# EAGLE board USBIRtoy-v3-3.3volt (EAGLE 5.10)
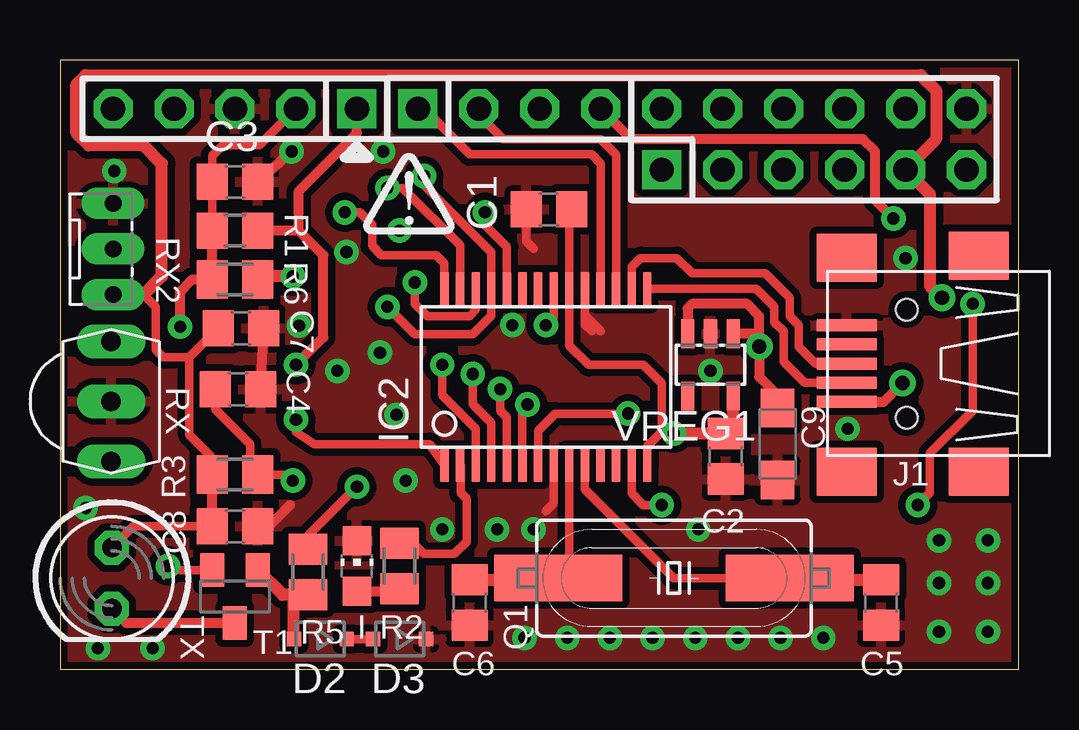
[diagram p0: board, top side]
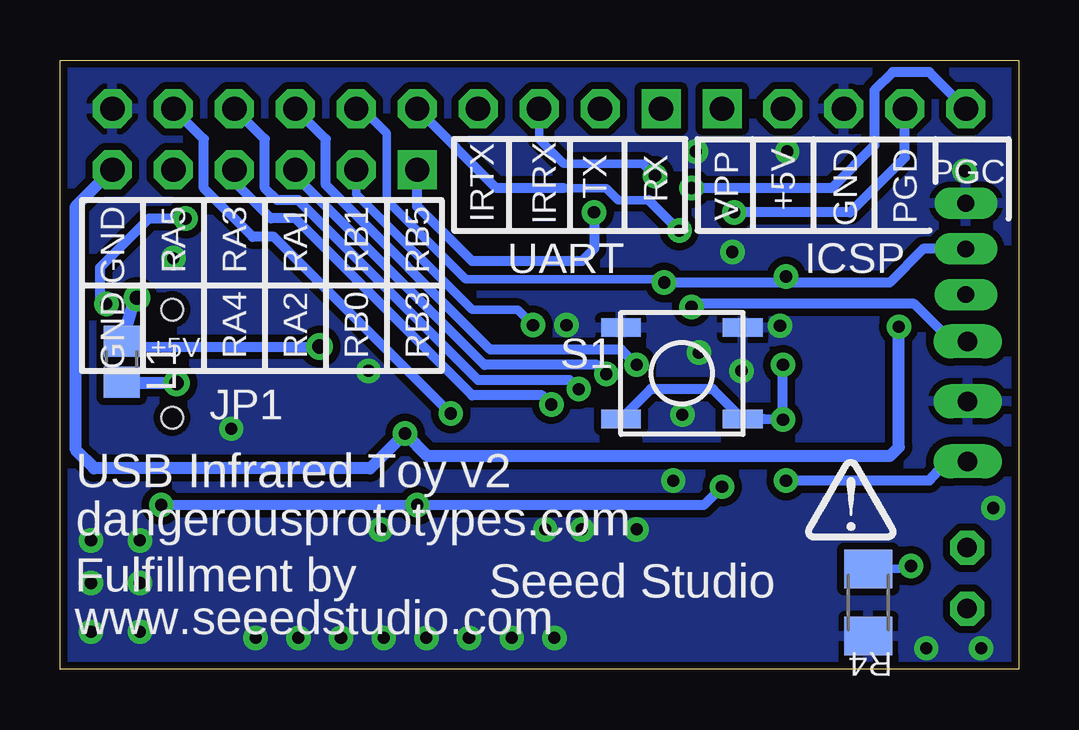
[diagram p1: board, bottom side, seen from below]

Size 39.94 x 25.4 mm. Coordinates in mm from the lower left corner, seen from the top.
Outline: 39.94,0.01 0,0.01 0,25.39 39.94,25.39
Outline: 39.94,0 39.94,0.01
Outline: 39.94,0.01 39.94,25.39
Outline: 39.94,25.39 39.94,25.4
Copper layers (1*16): Top 0.035mm / dielectric 1.5mm / Bottom 0.035mm
Design rules "SparkFun": minimum track width 8mil, minimum drill 20mil, track to track 8mil, track to pad 8mil, pad to pad 8mil, via to via 8mil, smd to smd 8mil, copper to edge 10mil, drill to drill 8mil, minimum pad ring 12mil, minimum via ring 10mil, stop-mask expansion 4mil, vias tented up to drill 25mil, thermal gap 10mil

## Footprints (pad centres in the part's own frame; a part is rotated, then mirrored left to right if it is on the bottom)
C0805 = smd 1.3 x 1.5: 1 -0.95,0; 2 0.95,0
SMC_A = smd 1.6 x 1.4: + -1.5,0; - 1.5,0
DO323 = smd 0.6 x 0.6: A 1.1,0; C -1.1,0
CHIP-LED0805 = smd 1.2 x 1.2: A 0,-1.05; C 0,1.05
SSOP28 = smd 0.348 x 1.397: 1 -4.225,-3.656; 2 -3.575,-3.656; 3 -2.925,-3.656; 4 -2.275,-3.656; 5 -1.625,-3.656; 6 -0.975,-3.656; 7 -0.325,-3.656; 8 0.325,-3.656; 9 0.975,-3.656; 10 1.625,-3.656; 11 2.275,-3.656; 12 2.925,-3.656; 13 3.575,-3.656; 14 4.225,-3.656; 15 4.225,3.656; 16 3.575,3.656; 17 2.925,3.656; 18 2.275,3.656; 19 1.625,3.656; 20 0.975,3.656; 21 0.325,3.656; 22 -0.325,3.656; 23 -0.975,3.656; 24 -1.625,3.656; 25 -2.275,3.656; 26 -2.925,3.656; 27 -3.575,3.656; 28 -4.225,3.656
1X05 = drill 1.016 square: 1 -5.08,0 | drill 1.016 octagon: 2 -2.54,0; 3 0,0; 4 2.54,0; 5 5.08,0
USB-M-S1 = smd 2.5 x 0.5: D+ 2.75,0; D- 2.75,0.8; GND 2.75,-1.6; ID 2.75,-0.8; VBUS 2.75,1.6 | smd 2.5 x 2: GND@1 -2.75,-4.5; GND@2 -2.75,4.5; GND@3 2.75,-4.4; GND@4 2.75,4.5 | hole 0.9: 0.25,2.25; 0.25,-2.25
2X06 = drill 1.016 square: 1 -6.35,-1.27 | drill 1.016 octagon: 2 -6.35,1.27; 3 -3.81,-1.27; 4 -3.81,1.27; 5 -1.27,-1.27; 6 -1.27,1.27; 7 1.27,-1.27; 8 1.27,1.27; 9 3.81,-1.27; 10 3.81,1.27; 11 6.35,-1.27; 12 6.35,1.27
FB805 = smd 1.3 x 1.5: 1 -0.85,0; 2 0.85,0
HC49UP = smd 5.334 x 1.93: 1 -4.826,0; 2 4.826,0
R0805 = smd 1.3 x 1.5: 1 -0.95,0; 2 0.95,0
M0805 = smd 1.3 x 1.6: 1 -0.95,0; 2 0.95,0
M1206 = smd 1.6 x 2: 1 -1.4,0; 2 1.4,0
TSOP18XX = drill 0.813 long: GND -0.001,-0.027; OUT -2.501,-0.027; VCC 2.499,-0.027
QSE15X = drill 0.7 long: 1 -1.9,-0.51; 2 0,-0.51; 3 1.91,-0.51
TACT_SWITCH_SMALL = smd 1.651 x 0.762: 1 -2.54,1.905; 2 2.54,1.905; 3 -2.54,-1.905; 4 2.54,-1.905
SOT23-BEC = smd 1 x 1.4: B -0.95,-1.1; C 0,1.1; E 0.95,-1.1
LED5MM = drill 0.813 octagon: A -1.27,0; K 1.27,0
1X04 = drill 1.016 square: 1 -3.81,0 | drill 1.016 octagon: 2 -1.27,0; 3 1.27,0; 4 3.81,0
SOT23-5 = smd 0.55 x 1.2: BYP 0.95,1.3; EN 0.95,-1.3; GND 0,-1.3; IN -0.95,-1.3; OUT -0.95,1.3

## Placement (x,y rotation side)
C1  0.1uf  [C0805]  20.36,19.18 180 top
C2  0.1uf  [C0805]  27.72,8.89 270 top
C3  1uF  [C0805]  7.28,20.32 0 top
C4  0.2uF  [C0805]  7.4,11.68 0 top
C5  27pf  [C0805]  34.2,2.79 270 top
C6  27pf  [C0805]  17.06,2.79 270 top
C7  0.22uF  [C0805]  7.53,14.22 0 top
C8  1.0uF  [C0805]  7.28,5.97 0 top
C9  [SMC_A]  29.88,9.4 270 top
D2  [DO323]  10.83,1.27 180 top
D3  [DO323]  14.14,1.27 180 top
I  LED  [CHIP-LED0805]  12.36,4.32 0 top
IC2  PIC18FJ2X50SSOP  [SSOP28]  20.23,12.19 0 top
ICSP  [1X05]  7.28,23.37 180 top
J1  USB-SHIELD  [USB-M-S1]  35.52,12.75 180 top
JP1  [2X06]  31.41,22.1 0 top
L1  [FB805]  37.38,12.83 270 bottom
Q1  16MHz  [HC49UP]  25.57,3.81 180 top
R1  10k  [R0805]  7.28,18.29 180 top
R2  2K7  [M0805]  14.14,4.32 90 top
R3  390R  [M0805]  7.28,8.13 180 top
R4  180R  [M1206]  6.26,2.79 90 bottom
R5  1K  [M0805]  10.33,4.06 90 top
R6  390R  [M0805]  7.28,16.26 180 top
RX  TSOP34838  [TSOP18XX]  2.15,11.18 270 top
RX2  QSE159  [QSE15X]  1.69,17.53 90 top
S1  SMD_TACT_SMALL  [TACT_SWITCH_SMALL]  14.03,12.34 180 bottom
T1  1A+, 40hfe+  [SOT23-BEC]  7.28,3.05 180 top
TX  940nm IR LED  [LED5MM]  2.15,3.81 270 top
U$1  [DP-LOGO]  12.61,18.14 0 top
U$2  [DP-LOGO]  8.9,5.38 0 bottom
UART  [1X04]  18.71,23.37 0 top
VREG1  [SOT23-5]  27.09,12.7 180 top

## Library data of the parts
C1-C8 R1-R6 = rcl
C9 D2 D3 L1 RX2 T1 VREG1 = dp_devices
I TX = led
IC2 = dp_devices; PIC18FJ2X50: PIC18FJ2X50
ICSP = pinhead-2
J1 = con-usb-2
JP1 UART = pinhean-jer
Q1 = crystal
RX = tsop
S1 U$1 U$2 = DP-logo

## Nets
3V3: C1.1 C2.1 C3.1 IC2.14 IC2.20 ICSP.2 JP1.11 R1.2 R6.2 VREG1.OUT
$N1112: J1.VBUS L1.2
C0: IC2.11
C1: IC2.12
GND: C1.2 C2.2 C3.2 C4.2 C5.2 C6.2 C7.2 C8.2 C9.- D3.C I.C IC2.8 IC2.19 ICSP.3 J1.GND JP1.12 R4.1 RX2.3 RX.GND S1.3 S1.4 VREG1.GND
IRDETECT: IC2.26 JP1.4 R6.1 RX2.2
IRRX: IC2.25 RX.OUT UART.3
IRTX: IC2.13 R5.2 UART.4
MCLR: IC2.1 ICSP.1 R1.1 S1.1 S1.2
N$1: C6.1 IC2.9 Q1.2
N$2: C5.1 IC2.10 Q1.1
N$4: D2.C D3.A
N$5: R4.2 T1.E
N$7: I.A R2.1
N$8: C4.1 R3.1 RX.VCC
N$9: IC2.2 R2.2
N$12: D2.A R5.1 T1.B
N$13: T1.C TX.K
PGC: IC2.27 ICSP.5
PGD: IC2.28 ICSP.4
RA1: IC2.3 JP1.6
RA2: IC2.4 JP1.5
RA3: IC2.5 JP1.8
RA4: IC2.6 JP1.7
RA5: IC2.7 JP1.10
RB0: IC2.21 JP1.3
RB1: IC2.22
RB2: IC2.23
RB3: IC2.24 JP1.1
RB5: JP1.2
RC4: IC2.15 J1.D-
RC5: IC2.16 J1.D+
RX: IC2.18 UART.1
TX: IC2.17 UART.2
VUSB: C7.1 C8.1 C9.+ JP1.9 L1.1 R3.2 RX2.1 TX.A VREG1.EN VREG1.IN

## Tracks (layer width: path | path; a pad name or v marks a point on that pad's centre or on a via)
3V3  (via drill 0.51)
  Top 0.356: C1.1 21.21,19.07 IC2.20 21.21,13.5 22.01,12.7 24.3,12.7 25.06,11.94 25.06,9.91 | IC2.14 24.46,9.3 25.06,9.91 | v25.57,9.84 25.12,9.84 25.06,9.91 | R1.2 C3.1 6.33,21.4 6.77,21.84 8.29,21.84 ICSP.2
  Top 0.406: R6.2 R1.2 | R6.2 6.07,16.51 | R6.2 5.5,16.26 4.99,15.75 v4.99,14.29
  Top 0.508: C1.1 21.63,19.49 | v25.57,9.84 C2.1 28.04,10.16 VREG1.OUT
  Bottom 0.508: v4.99,14.29 4.99,9.27 5.37,8.89 24.62,8.89 v25.57,9.84 27.02,8.38 38.52,8.38 39.28,9.14 39.28,19.3 JP1.11
$N1112  (via drill 0.6)
  Top 0.406: J1.VBUS 34.3,11.15 v35.09,11.94
  Bottom 0.508: v35.09,11.94 36.83,11.94 L1.2
GND  (via drill 0.51)
  Top 0.356: 22.52,14.1 21.86,14.76 IC2.19 21.86,14.38 22.14,14.1 | IC2.8 20.56,6.93 20.23,6.6 | C1.2 19.41,17.84 19.72,17.53
  Top 0.406: C4.2 C7.2 | C8.2 8.67,5.97 9.56,6.86 | C3.2 v9.64,21.59
  other vias: 9.94,14.33 2.25,20.78 13.32,13.21 14.01,10.62 26.58,5.84 14.39,7.87 1.56,0.89 27.09,12.45 13.45,21.59 35.22,17.14 32.8,10.03 11.93,17.4 15.91,5.84 18.2,5.84 18.83,14.35 24.68,1.32 11.54,12.45 36.61,1.57 38.65,1.57 38.65,3.61 36.61,3.61 36.61,5.38 38.65,5.38 26.45,1.32 22.9,1.32 21.12,1.32 19.34,1.32 28.23,1.32 30.01,1.32 31.79,1.32 1.05,6.73 3.85,0.89 19.72,5.84
  pour Top (isolate 0.305): -1.1,0 -1.1,25.4 40.81,25.4 40.81,0
  pour Bottom (isolate 0.305): -1.1,0 40.81,0 40.81,25.4 -1.1,25.4
IRDETECT  (via drill 0.51)
  Top 0.356: IC2.26 17.31,14.99 17.06,14.73 15.28,14.73 14.77,15.24 v14.77,16.13
  Top 0.508: v9.69,16.38 8.35,16.38 R6.1
  Bottom 0.356: JP1.4 27.34,23.37 26.33,22.35 26.33,19.56 23.03,16.26 14.9,16.26 v14.77,16.13
  Bottom 0.406: 9.82,16.13 5.37,16.13 3.98,17.53 RX2.2 | 9.82,16.13 v14.77,16.13 | v9.69,16.38 9.69,16.26 9.82,16.13
IRRX  (via drill 0.51)
  Top 0.356: v13.63,15.11 14.77,13.97 17.18,13.97 17.96,14.74 IC2.25 17.96,17.39 15.15,20.19 v15.15,20.57
  Bottom 0.356: 19.98,22.86 19.98,22.1 18.96,21.08 15.66,21.08 v15.15,20.57
  Bottom 0.406: 19.98,22.86 UART.3 | v13.63,15.11 13.5,15.24 4.36,15.24 2.83,13.72 2.16,13.72 RX.OUT
IRTX  (via drill 0.51)
  Top 0.356: IC2.13 23.81,7.35 24.3,6.86 v25.06,6.86 | v38.01,15.24 38.01,10.79 36.23,9.02 36.23,7.37 v35.73,6.86 | R5.2 10.33,5.59 v12.36,7.62
  Top 0.406: R5.2 10.07,5.01 | UART.4 23.79,22.1 33.44,22.1 33.95,21.59 33.95,19.56 v34.71,18.8
  Bottom 0.356: v12.36,7.62 12.36,7.37
  Bottom 0.406: v34.71,18.8 36.23,18.8 38.27,16.76 38.27,15.49 v38.01,15.24 | v12.36,7.62 13.12,6.86 v25.06,6.86 v35.73,6.86
MCLR  (via drill 0.51)
  Top 0.356: v9.82,10.41 9.82,9.91 10.58,9.4 15.4,9.4 IC2.1
  Top 0.406: ICSP.1 12.36,22.35 9.94,19.94 9.94,18.29 | v9.82,12.7 10.96,13.84 10.96,17.27 9.94,18.29 | 9.94,18.29 R1.1
  Bottom 0.406: S1.2 15.33,11.68 12.74,11.68 S1.1 10.6,10.44 v9.82,10.41 v9.82,12.7
N$1
  Top 0.356: IC2.9 21.21,4.11 21.25,4.06 20.99,4.06 Q1.2
  Top 0.508: C6.1 19.91,3.74 19.98,3.81 Q1.2
N$2
  Top 0.356: IC2.10 21.86,7.52 25.57,3.81 Q1.1
  Top 0.508: C5.1 30.97,3.74 30.9,3.81 Q1.1
N$4
  Top 0.356: D2.C D3.A
N$5  (via drill 0.51)
  Top 0.356: T1.E 4.65,4.15 v4.48,4.32
  Bottom 0.356: R4.2 4.61,4.19 v4.48,4.32
N$7
  Top 0.406: I.A 14.04,3.27 R2.1
N$8  (via drill 0.51)
  Top 0.356: v9.69,7.87 9.56,8.13 R3.1 7.91,8.44 7.91,9.4 6.45,10.86 C4.1
  Bottom 0.406: RX.VCC 3,8.68 3.72,7.87 v9.69,7.87
N$9
  Top 0.356: R2.2 14.71,5.27 15.15,4.83 16.42,4.83 16.93,5.33 16.93,7.11 16.68,7.37 16.68,8.52 IC2.2
N$12
  Top 0.508: 9.82,3.11 9.26,3.11 T1.B | 9.82,3.11 R5.1 | D2.A 9.73,3.03 9.82,3.11
N$13
  Top 0.406: T1.C 2.74,1.95 TX.K
PGC  (via drill 0.51)
  Top 0.356: 13.88,20.07 v13.63,20.07 14.26,20.07 16.66,17.67 IC2.27
  Bottom 0.406: v13.63,20.07 7.79,20.07 6.01,21.84 6.01,24.13 5.25,24.89 3.72,24.89 ICSP.5
PGD  (via drill 0.51)
  Top 0.356: IC2.28 16.01,16.92 15.66,17.27 13.37,17.27 12.99,17.65 12.99,18.54 12.48,19.05 v11.85,19.05
  Bottom 0.406: v11.85,19.05 7.02,19.05 4.74,21.34 ICSP.4
RA1  (via drill 0.51)
  Top 0.356: IC2.3 17.31,10.04 15.91,11.43 v15.91,12.7
  Bottom 0.406: JP1.6 28.87,22.1 28.87,20.19 22.01,13.34 16.55,13.34 v15.91,12.7
RA2  (via drill 0.51)
  Top 0.356: IC2.4 17.96,10.28 17.18,11.05 v17.18,12.32
  Bottom 0.406: v17.18,12.32 17.56,12.7 22.26,12.7 30.14,20.57 JP1.5 30.14,20.32
RA3  (via drill 0.51)
  Top 0.356: IC2.5 18.61,10.52 18.33,10.79 v18.33,11.68
  Bottom 0.406: JP1.8 31.41,22.1 31.41,20.07 30.9,19.56 30.01,19.56 22.52,12.07 18.71,12.07 v18.33,11.68
RA4  (via drill 0.51)
  Top 0.356: IC2.6 19.26,10.84 v19.47,11.05
  Bottom 0.406: JP1.7 32.68,20.32 31.15,18.8 30.14,18.8 22.77,11.43 19.85,11.43 v19.47,11.05
RA5  (via drill 0.51)
  Top 0.356: IC2.7 19.91,9.96 20.61,10.67 v23.66,10.67
  Bottom 0.406: JP1.10 33.95,22.1 33.95,20.07 31.92,18.03 31.03,18.03 v23.66,10.67
RB0  (via drill 0.51)
  Top 0.356: IC2.21 20.56,14.68 v20.23,14.35
  Bottom 0.356: JP1.3 27.6,19.81 22.77,14.99 20.87,14.99 v20.23,14.35
RB3  (via drill 0.51)
  Top 0.356: IC2.24 18.61,17.63 17.69,18.54 v17.69,19.05
  Bottom 0.406: JP1.1 25.06,19.3 22.77,17.02 18.2,17.02 17.69,17.53 v17.69,19.05
RB5  (via drill 0.51)
  Bottom 0.356: 15.41,19.56 16.68,19.56 17.18,20.07 18.96,20.07
  Bottom 0.406: JP1.2 21.76,20.07 18.96,20.07 | v14.14,18.29 15.41,19.56
RC4
  Top 0.356: J1.D- 31.01,11.95 30.14,12.83 30.14,14.1 29.76,14.48 29.76,15.11 28.99,15.88 24.48,15.88 IC2.15
RC5
  Top 0.356: IC2.16 23.81,16.78 24.17,17.14 25.69,17.14 26.33,16.51 29.38,16.51 30.39,15.49 30.39,14.73 30.77,14.35 30.77,13.46 31.48,12.75 J1.D+
RX
  Top 0.356: UART.1 15.15,23.11 15.41,23.11 17.06,21.46 22.14,21.46 22.52,21.08 22.52,16.37 IC2.18
TX
  Top 0.356: UART.2 17.44,23.11 18.45,22.1 22.52,22.1 23.16,21.46 IC2.17
VUSB  (via drill 0.6)
  Top 0.356: C8.1 3.04,5.97 TX.A | 5.37,13.02 C7.1 | 5.37,13.02 5.37,9.78 6.26,8.89 6.26,8.19 R3.2 | 5.37,13.02 4.3,13.02 3.98,13.34 3.98,15.11 3.47,15.62 RX2.1
  Top 0.406: v29.12,13.46 29.12,13.97 | 29.12,13.97 29.12,14.73 28.61,15.24 26.33,15.24 26.14,15.05 VREG1.EN | v29.12,13.46 29.09,13.49 | C9.+ 29.88,11.43 29.12,12.19 v29.12,13.46 | 6.33,6.29 C8.1 R3.2 | RX2.1 | VREG1.IN 29.09,14 29.12,13.97
  Top 0.508: v36.74,15.49 36.23,16 36.23,19.81 JP1.9 36.49,22.1 36.49,24.13 35.85,24.76 1.05,24.76 0.67,24.38 0.67,22.35 1.18,21.84 3.47,21.84 4.23,21.08 4.23,16.38 3.47,15.62 | 1.18,15.62 RX2.1
  Bottom 0.406: 36.83,13.72 L1.1 36.65,13.46 v29.12,13.46
  Bottom 0.508: L1.1 36.87,15.37 v36.74,15.49

## Text on the board
tNames: RX
bNames: PGC | PGD | GND | +5V | VPP | RX | TX | IRRX | IRTX | RB5 | RB1 | RA1 | RA3 | RA5 | GND | RB3 | RB0 | RA2 | RA4 | GND | +5V | USB Infrared Toy v2 | dangerousprototypes.com | Fulfillment by | Seeed Studio | www.seeedstudio.com
Reference: Programming | Serial | Header | Port | Expansion | RB5 | RB1 | RA1 | RA3 | RA5 | GND | CLOCK | DATA | GND | +5V | MCLR | RX | TX | IRRX | IRTX | RB3 | RB0 | RA2 | RA4 | +5V | GND | USB INFRARED TOY | CC-BY-SA | USB | Ian Lesnet 2010 | http://dangerousprototypes.com | LED